# Altium PCB Holder_Base_V3.PcbDoc
Units mm, origin at the board's own origin, x right, y up, seen from the top; angles counter-clockwise.
Board outline 280 x 50 mm, 2 copper layers (Top Layer, Bottom Layer); 19 components, 39 nets, 108 pads, 19 vias.
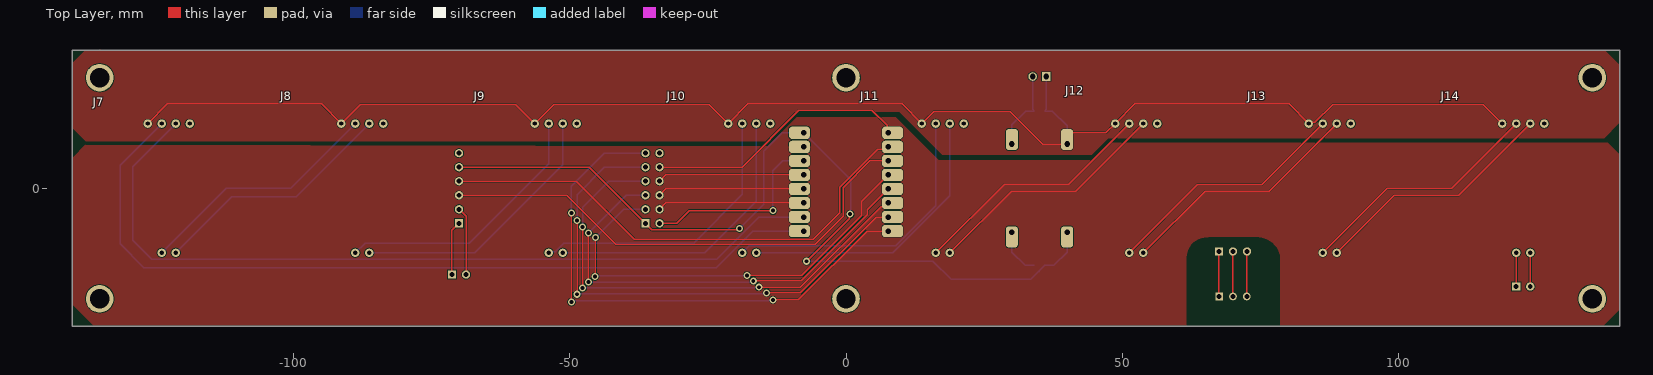
[diagram p0: Top Layer view]
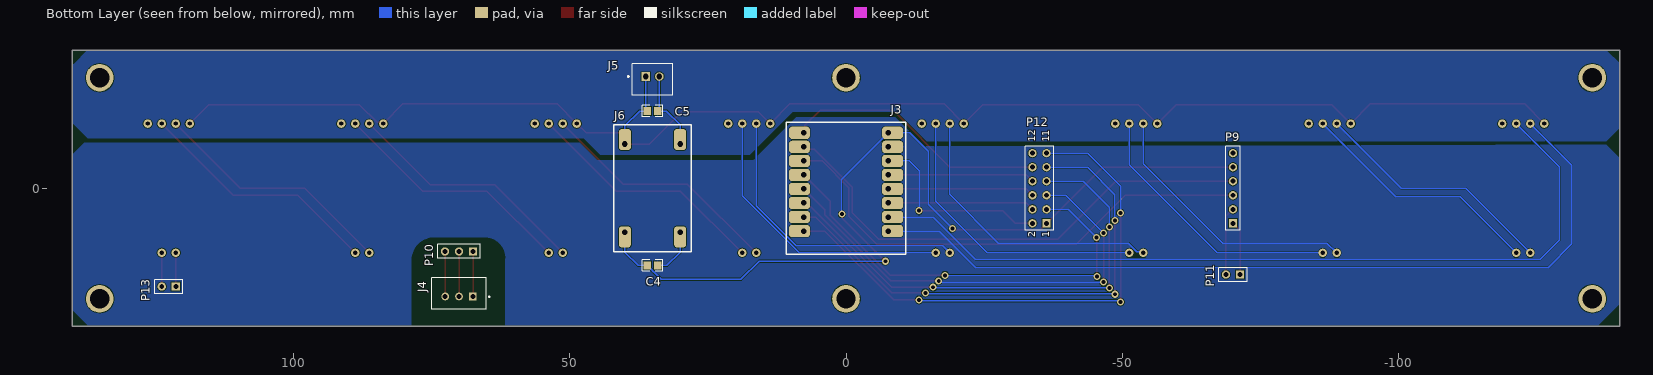
[diagram p1: Bottom Layer view, seen from below]

## Layer stack, top to bottom
Top Solder: solder mask 0.0102, Solder Resist, Dk 3.5
Top Layer: signal copper 0.0356
Dielectric 1: dielectric 0.32, FR-4, Dk 4.8
Bottom Layer: signal copper 0.0356
Bottom Solder: solder mask 0.0102, Solder Resist, Dk 3.5

## Board outline
-140,-25 -140,25 140,25 140,-25

## Design rules (kind name [scope] priority, off if disabled: settings)
BoardOutlineClearance [All] p1: gap=0.2 ignorepadtopadclearanceinfootprint=FALSE
Clearance [All] p1: gap=0.127 ignorepadtopadclearanceinfootprint=TRUE except(0.254: Arc-Hole Track-Hole SMDPad-Hole THPad-Hole Via-Hole Fill-Hole Poly-Hole Region-Hole Text-Hole)
ComponentClearance [All] p1: gap=0.127 collisioncheckmode=3 verticalgap=0.127 showdistances=TRUE
DiffPairsRouting [All] p1: maxlimit=0.254 minlimit=0.127 mostfreqgap=0.127 toplayer_minwidth=0.127 toplayer_maxwidth=25.4 toplayer_prefwidth=0.127 bottomlayer_minwidth=0.127 bottomlayer_maxwidth=25.4 bottomlayer_prefwidth=0.127 maxuncoupledlength=12.7
Height [All] p1: minheight=0 maxheight=1816.048 prefheight=12.7
HoleSize [All] p1: absolutevalues=TRUE maxlimit=6.3 minlimit=0.3 maxpercent=80.000 minpercent=20.000
HoleToHoleClearance [All] p1: gap=0.254 allowstackedmicrovias=FALSE
MinimumAnnularRing [All] p1: minimumring=0.152
MinimumSolderMaskSliver [All] p1: minsoldermaskwidth=0.152
PlaneClearance [All] p1: clearance=0.127
PlaneConnect PlaneConnectPowerPads [InPadClass('PowerPads')] p1: planeconnectstyle=Direct reliefexpansion=0.508 reliefentries=4 reliefconductorwidth=0.254 reliefairgap=0.254
PlaneConnect [All] p2: pad.planeconnectstyle=Relief pad.reliefexpansion=0.3 pad.reliefentries=4 pad.reliefconductorwidth=0.127 pad.reliefairgap=0.127 via.planeconnectstyle=Direct via.reliefexpansion=0.3 via.reliefentries=4 via.reliefconductorwidth=0.127 via.reliefairgap=0.127
PolygonConnect PolygonConnectPowerPads [All vs (InPadClass('PowerPads'))] p1: connectstyle=Direct reliefconductorwidth=0.254 reliefentries=4 polygonreliefangle="90 Angle" airgapwidth=0.254
PolygonConnect [All] p2: thpad.connectstyle=Relief thpad.reliefconductorwidth=0.127 thpad.reliefentries=4 thpad.polygonreliefangle="90 Angle" thpad.airgapwidth=0.127 smdpad.connectstyle=Relief smdpad.reliefconductorwidth=0.127 smdpad.reliefentries=4 smdpad.polygonreliefangle="90 Angle" smdpad.airgapwidth=0.127 via.connectstyle=Direct via.reliefconductorwidth=0.127 via.reliefentries=4 via.polygonreliefangle="90 Angle" via.airgapwidth=0.127
RoomDefinition Holder_PCB_V2 [InComponentClass('Holder_PCB_V2')] p1: confinementstyle=ConfineIn formatcopy=TRUE lockcomponents=FALSE outline -144.907,-33.274 144.653,-33.274 144.653,32.004 -144.907,32.004
RoutingVias [All] p1: holewidth=0.3 width=0.6 viastyle="Through Hole" minholewidth=0.3 minwidth=0.6 maxholewidth=0.6 maxwidth=6.6
SilkToSilkClearance [All] p1: silktosilkclearance=0.127
SilkToSolderMaskClearance [IsPad] p1: minsilkscreentomaskgap=0.127 clearancetoexposedcopper=TRUE
SolderMaskExpansion [All] p1: expansion=0.051 istentingtop=FALSE
UnRoutedNet [All] p1: checkbadconnections=TRUE
Width Width_10mil [All] p1: maxlimit=25.4 minlimit=0.254 preferedwidth=0.254 minimp=50.000000 maximp=50.000000 favimp=50.000000
Width Width_6mil [All] p2: maxlimit=25.4 minlimit=0.152 preferedwidth=0.152 minimp=50.000000 maximp=50.000000 favimp=50.000000
Width Power_20mil [All] p3: maxlimit=25.4 minlimit=0.508 preferedwidth=0.508 minimp=50.000000 maximp=50.000000 favimp=50.000000
Width Power_12mil [All] p4: maxlimit=25.4 minlimit=0.305 preferedwidth=0.305 minimp=50.000000 maximp=50.000000 favimp=50.000000
Width Width_5mil [All] p5: maxlimit=25.4 minlimit=0.127 preferedwidth=0.127 minimp=50.000000 maximp=50.000000 favimp=50.000000
19 further rules are at their usual default settings.

## Components (designator, comment, footprint, x,y, rotation, side; value= is the part's Value field where it differs from the comment)
C4 "100nF" 0805C 35,-13.97 r0 bottom
C5 "100nF" 0805C 35,13.97 r0 bottom
J3 "ESP32C3_SuperMini" ESP32C3_SuperMini 0,0 r180 bottom
J4 "Battery Charger Input" FP-B3B-XH-A_LF_SN-MFG 70,-19.05 r0 bottom
J5 "Battery Load Input" FP-B2B-XH-A_LF_SN-MFG 35,19.685 r180 bottom
J6 "Buck_Converter" Buck_Converter 35,0 r0 bottom
J7 "lixie" LIXIE -122.5,0 r0 top
J8 "lixie" LIXIE -87.5,0 r0 top
J9 "lixie" LIXIE -52.5,0 r0 top
J10 "lixie" LIXIE -17.5,0 r0 top
J11 "lixie" LIXIE 17.5,0 r0 top
J12 "lixie" LIXIE 52.5,0 r0 top
J13 "lixie" LIXIE 87.5,0 r0 top
J14 "lixie" LIXIE 122.5,0 r0 top
P9 "Clock Module" HDR1X6 -70,-6.35 r90 bottom
P10 "Battery Charger Output" HDR1X3 67.46,-11.43 r0 bottom
P11 "Extra Clock Pins" HDR1X2 -71.27,-15.621 r0 bottom
P12 "Extra Pins MCU" HDR2X6 -36.27,-6.35 r90 bottom
P13 "Data Out" HDR1X2 121.23,-17.78 r0 bottom

## Footprints (in the part's own frame and the unit in brackets; to place one, negate y for a bottom-side part, rotate by r counter-clockwise, add the part's x,y. Pads: shape width x height; smd on the part's side, far side on the other; paste and mask are expansions set on the pad)
0805C [mm] "0805 Footprint"
  rect 1.3x1.5 smd: 1(-0.95,0) 2(0.95,0)
  silkscreen extent -1.87,-1.02 1.88,1.02, body extent -1,-0.63 1,0.63, height 0.78
Buck_Converter [mm]
  rrect50% 2.2x3.8 hole 1 copper offset 0,0.8: 1(5,8) 2(-5,8)
  rrect50% 2.2x3.8 hole 1 copper offset 0,-0.8: 3(5,-8) 4(-5,-8)
  silkscreen extent -7,-11.5 7,11.5
ESP32C3_SuperMini [mm]
  rrect50% 3.8x2.2 hole 1 copper offset 0.8,0: 0(7.62,-7.747) 1(7.62,-5.207) 2(7.62,-2.667) 3(7.62,-0.127) 3V3(7.62,4.953) 4(7.62,2.413) 5V(7.62,10.033) GND(7.62,7.493)
  rrect50% 3.8x2.2 hole 1 copper offset -0.8,0: 5(-7.62,10.033) 6(-7.62,7.493) 7(-7.62,4.953) 8(-7.62,2.413) 9(-7.62,-0.127) 10(-7.62,-2.667) 20(-7.62,-5.207) 21(-7.62,-7.747)
  silkscreen extent -10.8,-11.94 10.8,11.94, body extent -8.91,-11.24 8.89,12.76, height 4.09
FP-B2B-XH-A_LF_SN-MFG [mm]
  rect 1.55x1.55 hole 1 paste-1000 mask+0: 1(-1.25,0.525)
  round 1.55 hole 1 paste-1000 mask+0: 2(1.25,0.525)
  silkscreen extent -4.5,-2.88 3.7,2.88, body extent -3.7,-2.88 3.7,2.88, height 7
FP-B3B-XH-A_LF_SN-MFG [mm]
  rect 1.4x1.4 hole 0.9 paste-1000 mask+0: 1(-2.5,0.525)
  round 1.4 hole 0.9 paste-1000 mask+0: 2(0,0.525) 3(2.5,0.525)
  silkscreen extent -5.6,-2.88 4.95,2.88, body extent -4.95,-2.88 4.95,2.89, height 7
HDR1X2 [mm] "Connector; Header; 2 Position"
  rect 1.5x1.5 hole 0.9: 1(0,0)
  round 1.5 hole 0.9: 2(2.54,0)
  silkscreen extent -1.27,-1.27 3.81,1.27
HDR1X3 [mm] "Connector; Header; 3 Position"
  rect 1.5x1.5 hole 0.9: 1(0,0)
  round 1.5 hole 0.9: 2(2.54,0) 3(5.08,0)
  silkscreen extent -1.27,-1.27 6.35,1.27
HDR1X6 [mm] "Connector; Header; 6 Position"
  rect 1.5x1.5 hole 0.9: 1(0,0)
  round 1.5 hole 0.9: 2(2.54,0) 3(5.08,0) 4(7.62,0) 5(10.16,0) 6(12.7,0)
  silkscreen extent -1.27,-1.27 13.97,1.27
HDR2X6 [mm] "Connector; Header; 6x2 Position"
  rect 1.5x1.5 hole 0.9: 1(0,0)
  round 1.5 hole 0.9: 2(0,2.54) 3(2.54,0) 4(2.54,2.54) 5(5.08,0) 6(5.08,2.54) 7(7.62,0) 8(7.62,2.54) 9(10.16,0) 10(10.16,2.54) 11(12.7,0) 12(12.7,2.54)
  silkscreen extent -1.27,-1.27 13.97,3.81
LIXIE [mil]
  round 60 hole 30: 1(-150,460) 2(-50,460) 3(50,460) 4(150,460) 5(-50,-460) 6(50,-460)

## Part data
C4 C5: library part C, "Capacitor", Reviewed by="RM - 2018/08/05", Revision="July-2002: Re-released for DXP Platform."
J4: library part CMP-17439-000014-3, "CONN HEADER VERT 3POS 2.5MM", Color=Natural, Contact Resistance=20mR, Current Rating=3A, Flammability Rating="UL94 V-0", Housing Color=White, Insulation Resistance=1GR, Max Operating Temperature=85°C, Max Voltage Rating (AC)=250V, Min Operating Temperature=-25°C, Connector Type=Header, Contact Finish - Mating=TIN, Contact Material=Brass, Contact Plating=Tin, Contact Shape=Square, Contact Type="Male Pin", Depth=5.75mm, Fastening Type=Detent, Gender=Male, Housing Material=Polyamide, Insulation Color=Natural, Insulation Material=Nylon, Lead Free="Lead Free", Lead Pitch=2.5mm, Length=9.9mm, Max Current Rating=3A, Max Voltage Rating (DC)=250V, Mount="Through Hole", Number of Contacts=3, Number of Positions=3, Number of Rows=1, Orientation=Straight, Packaging=Bulk, Pitch=2.5mm, REACH SVHC="No SVHC", Series=XH, Termination=Solder, Voltage Rating=250V, Voltage Rating (AC)=250V, Wire/Cable Gauge=22AWG
J5: library part CMP-2000-05888-3, "CONN HEADER VERT 2POS 2.5MM", Color=Natural, Contact Resistance=20mR, Current Rating=3A, Housing Color=White, Insulation Resistance=1GR, Max Operating Temperature=85°C, Max Voltage Rating (AC)=250V, Min Operating Temperature=-25°C, Connector Type="Male Pin", Contact Material=Brass, Contact Plating=Tin, Contact Type="Male Pin", Depth=5.75mm, Fastening Type=Detent, Housing Material=Polyamide, Lead Free="Lead Free", Lead Pitch=2.5mm, Length=7.4mm, Max Current Rating=3A, Max Voltage Rating (DC)=250V, Mount="Through Hole", Number of Contacts=2, Number of Positions=2, Number of Rows=1, Orientation=Straight, Packaging=Bulk, Pitch=2.5mm, REACH SVHC="No SVHC", Series=XH, Termination=Solder, Voltage Rating=250V, Voltage Rating (AC)=250V, Wire/Cable Gauge=22AWG
P9: library part "Header 6", "Header, 6-Pin", LatestRevisionDate=17-Jul-2002, LatestRevisionNote="Re-released for DXP Platform.", Publisher="Altium Limited"
P10: library part "Header 3", "Header, 3-Pin", LatestRevisionDate=17-Jul-2002, LatestRevisionNote="Re-released for DXP Platform.", Publisher="Altium Limited"
P11 P13: library part "Header 2", "Header, 2-Pin", LatestRevisionDate=17-Jul-2002, LatestRevisionNote="Re-released for DXP Platform.", Publisher="Altium Limited"
P12: library part "Header 6X2", "Header, 6-Pin, Dual row", LatestRevisionDate=17-Jul-2002, LatestRevisionNote="Re-released for DXP Platform.", Publisher="Altium Limited"

## Free pads (board coordinates)
  round 5 hole 3.5: 2(0,-20) 3(0,20) 4(135,-20) 5(135,20) 6(-135,20) 7(-135,-20)

## Via types
v1: diameter 1.27, hole 0.711, Top Layer to Bottom Layer, tented both sides, 19 vias

## Nets (pads, with @x,y where several pads share a name; then routed paths per layer and width w, separated by ;. In a path a pad name is that pad's centre, name@x,y a point inside that pad or via, vN(x,y) a via of type N, cw(c..) or ccw(c..) an arc to the next point about the centre after c; other vN are vias at no path point)
3V3: J3.3V3 P12.2 | length 35
  Top Layer w0.254: P12.2 -30.607,-6.35 -28.321,-4.064 v1(-13.208,-4.064)
  Bottom Layer w0.254: v1(-13.208,-4.064) -13.208,3.175 -11.43,4.953 J3.3V3
32K: P9.1 P11.1 | length 9.8
  Top Layer w0.254: P11.1 -71.27,-7.62 P9.1
+5: C4.2 J3.5V J6.1 P9.5 P12.1 | length 164.1
  Top Layer w0.254: P9.5 -46.43,3.81 -35.139,-7.481 -19.734,-7.481 -19.535,-7.283 v1(-19.26,-7.283) ; v1(-7.112,-13.208) 0.568,-5.528 0.568,-4.893 v1(0.762,-4.699)
  Bottom Layer w0.254: v1(-19.26,-7.283) -14.859,-2.881 -14.859,6.731 -11.557,10.033 J3.5V 0.889,1.524 0.889,-4.572 v1(0.762,-4.699) ; v1(-7.112,-13.208) 15.716,-13.208 19.001,-16.494 33.426,-16.494 34.819,-15.101 34.858,-15.101 35.081,-14.878 35.081,-14.839 C4.2 37.592,-13.97 40,-11.562 J6.1
A0: J3.2 P12.4 | length 26.6
  Top Layer w0.254: P12.4 -32.587,-2.667 J3.2
A1: J3.3 P12.6 | length 26.6
  Top Layer w0.254: P12.6 -32.587,-0.127 J3.3
A2: J3.4 P12.8 | length 26.6
  Top Layer w0.254: P12.8 -32.587,2.413 J3.4
A3: J3.5 P12.10 | length 48
  Top Layer w0.254: P12.10 -18.796,3.81 -8.509,14.097 4.699,14.097 7.431,11.365 7.431,10.222 J3.5
B+: C5.2 J5.1 J6.3 J7.1 J8.1 J9.1 J10.1 J11.1 J12.1 J13.1 J14.1 | length 284
  Top Layer w0.254: J7.1 -122.754,15.24 -94.866,15.24 J8.1 -87.881,15.113 -59.739,15.113 J9.1 -52.881,15.113 -24.739,15.113 J10.1 -17.754,15.24 10.134,15.24 J11.1 15.849,13.843 29.718,13.843 35.561,8 J6.3 40,9.082 40.941,10.023 47.029,10.023 J12.1 52.246,15.24 80.134,15.24 J13.1 83.909,11.903 84.833,11.903 88.043,15.113 115.261,15.113 J14.1
  Bottom Layer w0.254: J5.1 36.25,14.27 C5.2 37.338,13.97 40,11.308 J6.3@40,9.082 ; J6.3 J6.3@40,9.082 ; J6.3@40.941,10.023 J6.3@40,9.082
B-: C5.1 J5.2 J6.4 J7.4 J8.4 J9.4 J10.4 J11.4 J12.4 J13.4 J14.4 | length 18.7
  Top Layer w0.254: J6.4 30,9.082 J6.4@30.941,10.023
  Bottom Layer w0.254: J6.4@29.059,10.023 J6.4@30,9.082 ; J6.4 J6.4@30,9.082 ; J5.2 33.75,14.27 C5.1 32.512,13.97 30,11.458 J6.4@30,9.082
Balance: J4.2 P10.2 | length 8.1
  Top Layer w0.254: J4.2 P10.2
BC+: J4.1 P10.1 | length 8.2
  Top Layer w0.254: P10.1 67.46,-19.535 J4.1
BC-: J4.3 P10.3 | length 8.2
  Top Layer w0.254: J4.3 72.52,-19.555 72.52,-11.45 P10.3
CLK_SCL: J3.7 P9.3 | length 90.6
  Top Layer w0.254: P9.3 -50.546,-1.27 -41.656,-10.16 -5.588,-10.16 -0.508,-5.08 -0.508,0.127 4.318,4.953 J3.7
CLK_SDA: J3.6 P9.4 | length 91.6
  Top Layer w0.254: P9.4 -48.768,1.27 -38.27,-9.228 -5.926,-9.228 -1.143,-4.445 -1.143,0.21 5.717,7.07 7.197,7.07 J3.6
CLK_SQW: P9.2 P11.2 | length 12.3
  Top Layer w0.254: P9.2 -68.73,-5.08 P11.2
DIN_SK6812_1: J3.0 J7.2 | length 153.1
  Bottom Layer w0.254: J7.2 -131.318,4.136 -131.318,-10.033 -127,-14.351 -23.495,-14.351 -16.891,-7.747 J3.0
DIN_WS2812_1: J3.1 J7.3 | length 150.3
  Bottom Layer w0.254: J7.3 -129.032,3.882 -129.032,-9.398 -125.603,-12.827 -23.368,-12.827 -15.748,-5.207 J3.1
DOUT_SK6812_1: J7.5 J8.2 | length 44.7
  Bottom Layer w0.254: J7.5 -112.086,0 -100.454,0 J8.2
DOUT_SK6812_2: J8.5 J9.2 | length 48.9
  Bottom Layer w0.254: J8.5 -86.992,-9.906 -68.144,-9.906 -53.77,4.468 J9.2
DOUT_SK6812_3: J9.5 J10.2 | length 52.2
  Bottom Layer w0.254: J9.5 -53.551,-11.465 -52.627,-11.465 -51.068,-9.906 -27.559,-9.906 -18.77,-1.117 J10.2
DOUT_SK6812_4: J10.5 J11.2 | length 53.4
  Bottom Layer w0.254: J10.5 -17.5,-10.414 8.97,-10.414 16.23,-3.154 J11.2
DOUT_SK6812_5: J11.5 J12.2 | length 44.7
  Top Layer w0.254: J11.5 28.676,0.762 40.308,0.762 J12.2
DOUT_SK6812_6: J12.5 J13.2 | length 44.7
  Top Layer w0.254: J12.5 63.549,0.635 75.181,0.635 J13.2
DOUT_SK6812_7: J13.5 J14.2 | length 44.7
  Top Layer w0.254: J13.5 97.914,0 109.546,0 J14.2
DOUT_SK6812_8: J14.5 P13.1 | length 6.1
  Top Layer w0.254: P13.1 J14.5
DOUT_WS2812_1: J7.6 J8.3 | length 44.7
  Bottom Layer w0.254: J7.6 -111.07,-1.524 -99.438,-1.524 J8.3
DOUT_WS2812_2: J8.6 J9.3 | length 49
  Bottom Layer w0.254: J8.6 -67.183,-11.684 -51.23,4.269 J9.3
DOUT_WS2812_3: J9.6 J10.3 | length 52.9
  Bottom Layer w0.254: J9.6 -25.527,-11.684 -16.23,-2.387 J10.3
DOUT_WS2812_4: J10.6 J11.3 | length 52.3
  Bottom Layer w0.254: J10.6 8.418,-11.684 18.77,-1.332 J11.3
DOUT_WS2812_5: J11.6 J12.3 | length 44.7
  Top Layer w0.254: J11.6 29.946,-0.508 41.578,-0.508 J12.3
DOUT_WS2812_6: J12.6 J13.3 | length 44.7
  Top Layer w0.254: J12.6 64.946,-0.508 76.578,-0.508 J13.3
DOUT_WS2812_7: J13.6 J14.3 | length 44.7
  Top Layer w0.254: J13.6 99.184,-1.27 110.816,-1.27 J14.3
DOUT_WS2812_8: J14.6 P13.2 | length 6.1
  Top Layer w0.254: P13.2 J14.6
GND: C4.1 J3.GND J6.2 P9.6 P12.12 | length 8.6
  Bottom Layer w0.254: J6.2 30,-11.585 32.385,-13.97 C4.1
MISO: J3.9 P12.5 | length 83.7
  Top Layer w0.254: v1(-46.609,-8.114) -46.58,-8.143 -46.58,-16.931 v1(-46.551,-16.96) ; v1(-16.771,-16.764) -8.128,-16.764 3.82,-4.816 3.82,-3.927 J3.9
  Bottom Layer w0.254: v1(-46.609,-8.114) -39.765,-1.27 P12.5 ; v1(-46.551,-16.96) -46.547,-16.964 -17.246,-16.964 -17.046,-16.764 v1(-16.771,-16.764)
MOSI: J3.10 P12.7 | length 89.5
  Top Layer w0.254: v1(-47.625,-18.041) v1(-47.625,-6.978) ; v1(-15.763,-17.907) -8.255,-17.907 6.348,-3.304 6.983,-3.304 J3.10
  Bottom Layer w0.254: v1(-47.625,-18.041) -47.56,-17.976 -15.832,-17.976 v1(-15.763,-17.907) ; v1(-47.625,-6.978) -47.625,-3.429 -42.926,1.27 P12.7
RX: J3.20 P12.9 | length 94.5
  Top Layer w0.254: v1(-48.641,-19.177) v1(-48.641,-5.842) ; v1(-14.351,-18.923) -8.255,-18.923 5.461,-5.207 J3.20
  Bottom Layer w0.254: v1(-48.641,-19.177) -48.578,-19.113 -14.541,-19.113 v1(-14.351,-18.923) ; v1(-48.641,-5.842) -48.641,-1.143 -43.688,3.81 P12.9
SCK: J3.8 P12.3 | length 80.4
  Top Layer w0.254: v1(-45.412,-15.948) -45.355,-15.891 -45.355,-8.947 v1(-45.297,-8.89) ; v1(-17.907,-15.748) -8.001,-15.748 2.893,-4.854 2.893,-2.314 J3.8
  Bottom Layer w0.254: v1(-45.412,-15.948) -45.312,-15.848 -18.007,-15.848 v1(-17.907,-15.748) ; v1(-45.297,-8.89) -40.217,-3.81 P12.3
TX: J3.21 P12.11 | length 99.4
  Top Layer w0.254: v1(-49.657,-20.574) v1(-49.657,-4.445) ; v1(-13.208,-20.193) -8.636,-20.193 3.81,-7.747 J3.21
  Bottom Layer w0.254: v1(-49.657,-20.574) -49.466,-20.383 -13.399,-20.383 v1(-13.208,-20.193) ; v1(-49.657,-4.445) -49.657,0.381 -43.688,6.35 P12.11

## Polygon pours and split planes (outlines as drawn)
GND on Top Layer "NONET_L-01_P-001" (solid, pour order 7): -137.565,7.875 -139.979,5.461 -139.979,-20.955 -135.915,-25.019 61.57,-25.019 61.57,-12.827 cw(c65.316,-12.636) 65.507,-8.89 74.524,-8.89 cw(c74.524,-12.954) 78.588,-12.954 78.588,-25.019 136.881,-25.019 140.056,-21.844 140.056,5.969 137.769,8.256 47.753,8.256 44.577,5.08 16.764,5.08 9.017,12.827 -8.915,12.827 -14.123,7.619
B- on Top Layer "NONET_L-01_P-001" (solid, pour order 0): -137.541,25.019 -139.954,22.606 -139.954,10.922 -137.541,8.509 -14.605,8.509 -9.271,13.843 9.652,13.843 17.399,6.096 23.876,6.096 24.003,6.096 24.13,6.096 44.45,6.096 47.434,9.08 137.16,9.08 140,11.92 140,22.179 137.16,25.019 -130.992,25
no net on Top Layer "NONET_L-01_P-001" (solid, pour order 1): -135.001,24.892 -135.001,24.964 -135.001,25.019
GND on Bottom Layer "NONET_L-01_P-001" (solid, pour order 6): -137.54,7.875 -139.954,5.461 -139.954,-20.955 -135.89,-25.019 61.595,-25.019 61.595,-12.827 cw(c65.341,-12.637) 65.532,-8.89 74.549,-8.89 cw(c74.549,-12.954) 78.613,-12.954 78.613,-25.019 136.906,-25.019 140.081,-21.844 140.081,5.969 137.794,8.255 48.133,8.255 44.958,5.08 16.764,5.08 9.017,12.827 -8.89,12.827 -14.098,7.619
B- on Bottom Layer "NONET_L-01_P-001" (solid, pour order 2): -137.529,25 -139.972,22.606 -139.972,10.901 -137.559,8.488 -14.623,8.46 -9.289,13.794 9.634,13.794 17.381,6.047 23.858,6.047 23.985,6.047 24.112,6.047 44.432,6.047 47.416,9.032 137.142,9.032 139.936,11.826 140,22.179 137.18,24.999 -130.122,24.914

## Silkscreen, mask and mechanical layers (free items; w line width, h text height)
Mechanical 13:
  the board outline again, w0.254

## Text inside footprints (layer, text, board x,y; h text height)
P12: Bottom Overlay "12" at -34.238,8.382 h1.27 r270; Bottom Overlay "1" at -36.778,9.398 h1.27 r270; Bottom Overlay "1" at -36.778,8.382 h1.27 r270; Bottom Overlay "1" at -36.778,-8.89 h1.27 r270; Bottom Overlay "2" at -34.238,-8.89 h1.27 r270